# EAGLE board markey (EAGLE 6.0)

Size 86.25 x 22.61 mm. Coordinates in mm from the lower left corner, seen from the top.
Outline: 0,11.3 arc90 11.3,0 81.25,0 arc90 86.25,5 86.25,17.61 arc90 81.25,22.61 11.3,22.61 arc90 0,11.3
Copper layers (1*16): Top 0.035mm / dielectric 1.5mm / Bottom 0.035mm
Design rules: minimum track width 10mil, minimum drill 24mil, track to track 8mil, track to pad 8mil, pad to pad 8mil, via to via 8mil, smd to smd 8mil, copper to edge 40mil, drill to drill 8mil, minimum pad ring 10mil, minimum via ring 8mil, stop-mask expansion 4mil, vias tented up to drill 0mil, thermal gap 10mil
Holes 3.2 mm at 4,11.3

## Footprints (pad centres in the part's own frame; a part is rotated, then mirrored left to right if it is on the bottom)
TQFP32-08 = smd 1.27 x 0.559: 1 -4.293,2.8; 2 -4.293,2; 3 -4.293,1.2; 4 -4.293,0.4; 5 -4.293,-0.4; 6 -4.293,-1.2; 7 -4.293,-2; 8 -4.293,-2.8; 17 4.293,-2.8; 18 4.293,-2; 19 4.293,-1.2; 20 4.293,-0.4; 21 4.293,0.4; 22 4.293,1.2; 23 4.293,2; 24 4.293,2.8 | smd 0.559 x 1.27: 9 -2.8,-4.293; 10 -2,-4.293; 11 -1.2,-4.293; 12 -0.4,-4.293; 13 0.4,-4.293; 14 1.2,-4.293; 15 2,-4.293; 16 2.8,-4.293; 25 2.8,4.293; 26 2,4.293; 27 1.2,4.293; 28 0.4,4.293; 29 -0.4,4.293; 30 -1.2,4.293; 31 -2,4.293; 32 -2.8,4.293
1X14 = drill 1.016 pad 1.88: 1 0,0; 2 2.54,0; 3 5.08,0; 4 7.62,0; 5 10.16,0; 6 12.7,0; 7 15.24,0; 8 17.78,0; 9 20.32,0; 10 22.86,0; 11 25.4,0; 12 27.94,0; 13 30.48,0; 14 33.02,0
TACTILE-PTH = drill 1.016 pad 1.88: 1 -3.251,2.261; 2 3.251,2.261; 3 -3.251,-2.261; 4 3.251,-2.261
5X7 = drill 1 pad 2.184: P$1 3.65,4.16; P$2 6.2,4.16; P$3 8.753,4.16; P$4 11.305,4.16; P$5 13.857,4.16; P$6 16.41,4.16; P$7 18.96,4.16; P$8 3.65,27.66; P$9 6.2,27.66; P$10 8.753,27.66; P$11 11.305,27.66; P$12 13.857,27.66; P$13 16.41,27.66; P$14 18.96,27.66
R-7 = drill 0.6 pad 1.27: P$1 -3.25,0; P$2 3.25,0
CR2032_EBAY = drill 1 pad 2.54: P$1 -13.2,0; P$2 6.8,0 | hole 1.3: 8,4; 8,-4

## Placement (x,y rotation side)
IC1  MEGA8-AI  [TQFP32-08]  27,11 135 bottom
JP1  M14  [1X14]  27.41,70.19 0 top  (outside the outline)
S1  [TACTILE-PTH]  78,11 90 top
U$1  5X7_SMALL_MX  [5X7]  43.12,0 90 top
U$2  5X7_SMALL_MX  [5X7]  74.94,0 90 top
U$3  R-7  [R-7]  4.28,-2.05 0 top
U$4  CR2032  [CR2032_EBAY]  70.87,11.3 0 top

## Library data of the parts
IC1 = atmel; MPN: ATMEGA8-16AU; OC_FARNELL: 9171371; OC_NEWARK: 73M8863
JP1 = SparkFun-Connectors
S1 = SparkFun
U$1-U$4 = Mrule

## Nets
GND: IC1.3 IC1.5 IC1.21 U$4.P$2
N$1: IC1.27 JP1.10 U$1.P$9 U$2.P$5 U$2.P$10
N$2: IC1.28 JP1.9 U$1.P$4 U$1.P$11 U$2.P$2
N$3: IC1.12 JP1.2 U$1.P$2 U$2.P$4 U$2.P$11
N$4: IC1.11 JP1.3 U$1.P$5 U$1.P$10 U$2.P$9
N$5: IC1.13 JP1.1 U$1.P$1 U$2.P$3
N$6: IC1.10 JP1.4 U$1.P$7 U$2.P$6
N$7: IC1.9 JP1.5 U$1.P$8 U$2.P$12
N$8: IC1.32 JP1.8 U$1.P$3 U$2.P$1
N$9: IC1.26 JP1.11 U$1.P$6 U$2.P$7
N$10: IC1.25 JP1.12 U$1.P$12 U$2.P$8
N$11: IC1.23 JP1.14 U$2.P$14
N$12: IC1.24 JP1.13 U$2.P$13
N$13: IC1.1 JP1.7 U$1.P$14
N$14: IC1.2 JP1.6 U$1.P$13
N$15: IC1.29 U$3.P$2
VCC: IC1.4 IC1.6 IC1.18 IC1.20 U$3.P$1 U$4.P$1

## Tracks (layer width: path | path; a pad name or v marks a point on that pad's centre or on a via)
GND  (3 unrouted)
N$1  (4 unrouted)
N$2  (4 unrouted)
N$3  (4 unrouted)
N$4  (4 unrouted)
N$5  (3 unrouted)
N$6  (3 unrouted)
N$7  (3 unrouted)
N$8  (3 unrouted)
N$9  (3 unrouted)
N$10  (3 unrouted)
N$11  (2 unrouted)
N$12  (2 unrouted)
N$13  (2 unrouted)
N$14  (2 unrouted)
N$15  (1 unrouted)
VCC  (5 unrouted)